# Altium PCB ArduinoUnoShield.PcbDoc
Units mil, origin at the board's own origin, x right, y up, seen from the top; angles counter-clockwise.
Board outline 2700 x 2100 mil, 2 copper layers (Top Layer, Bottom Layer); 16 components, 35 nets, 80 pads, 0 vias.
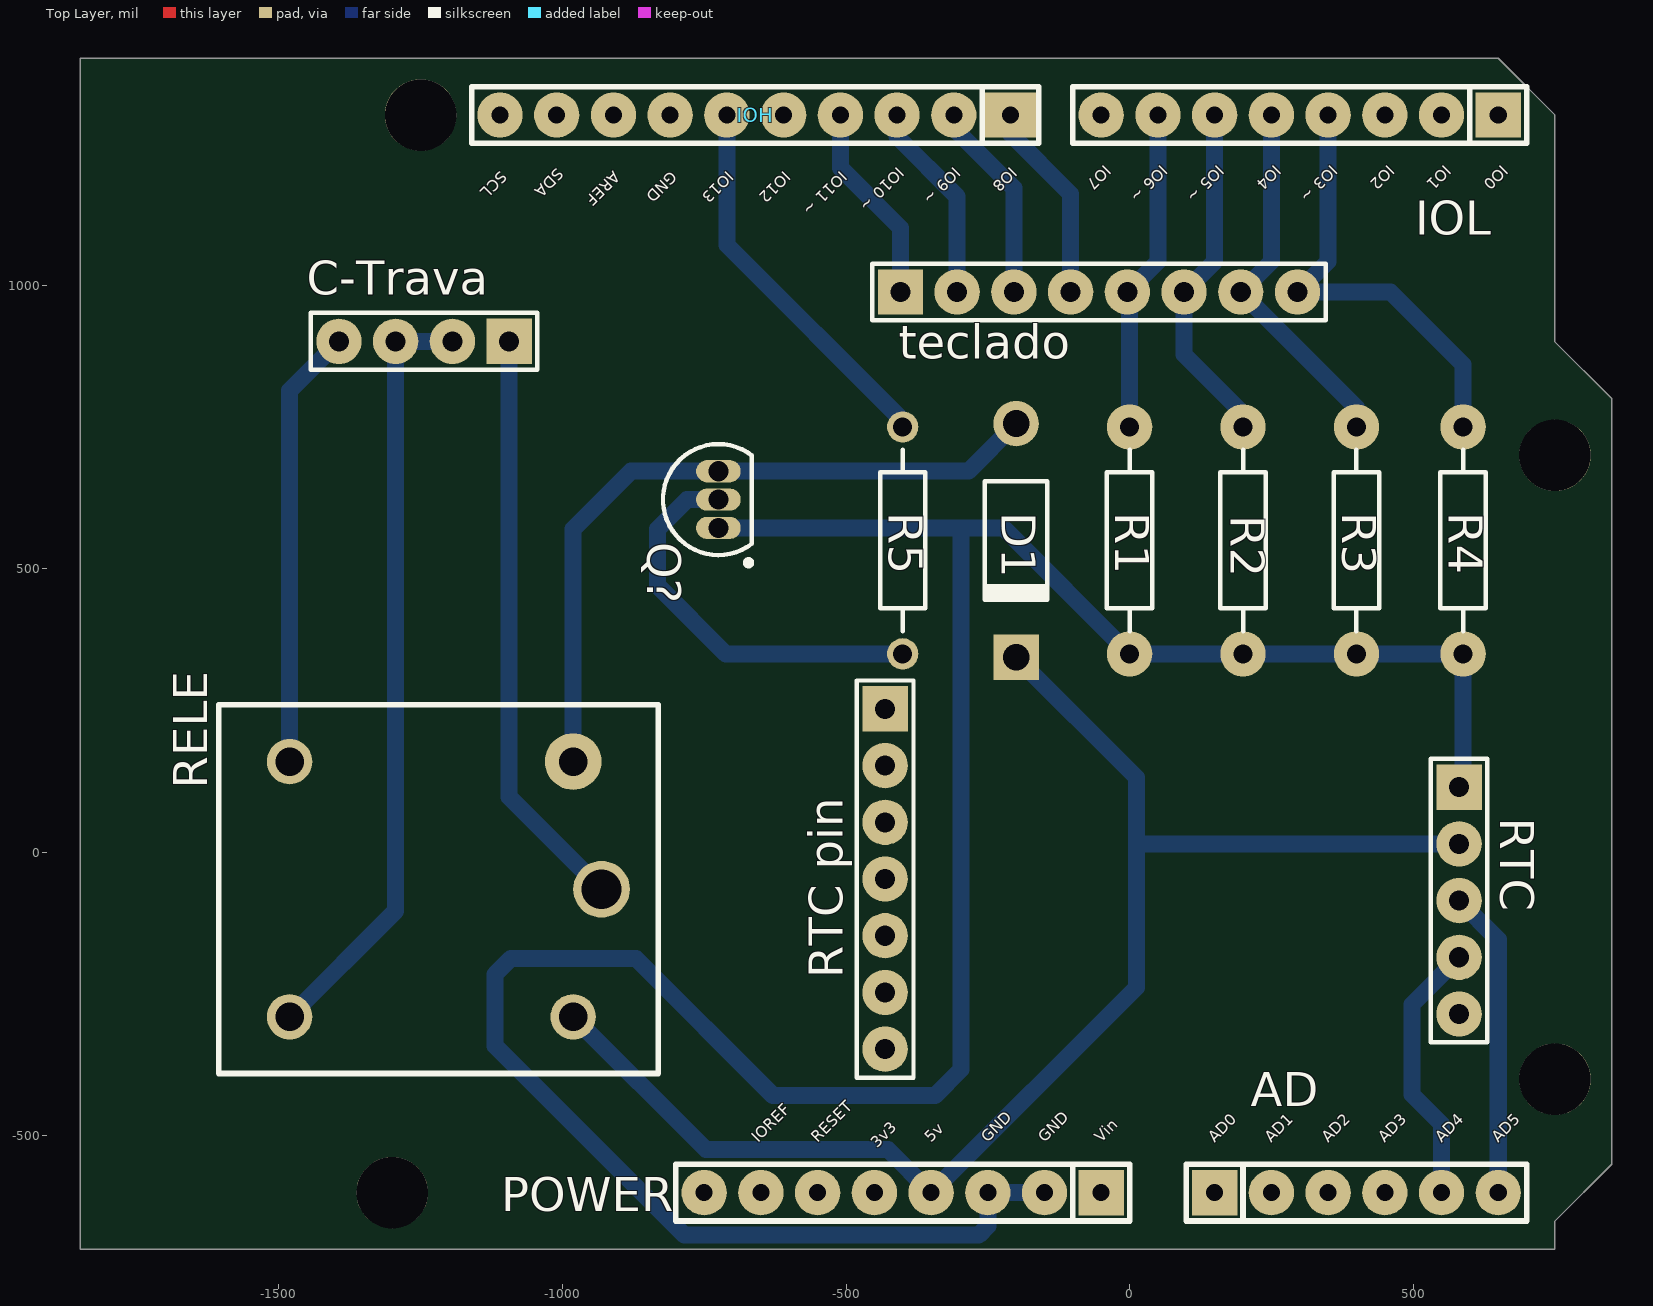
[diagram p0: Top Layer view]
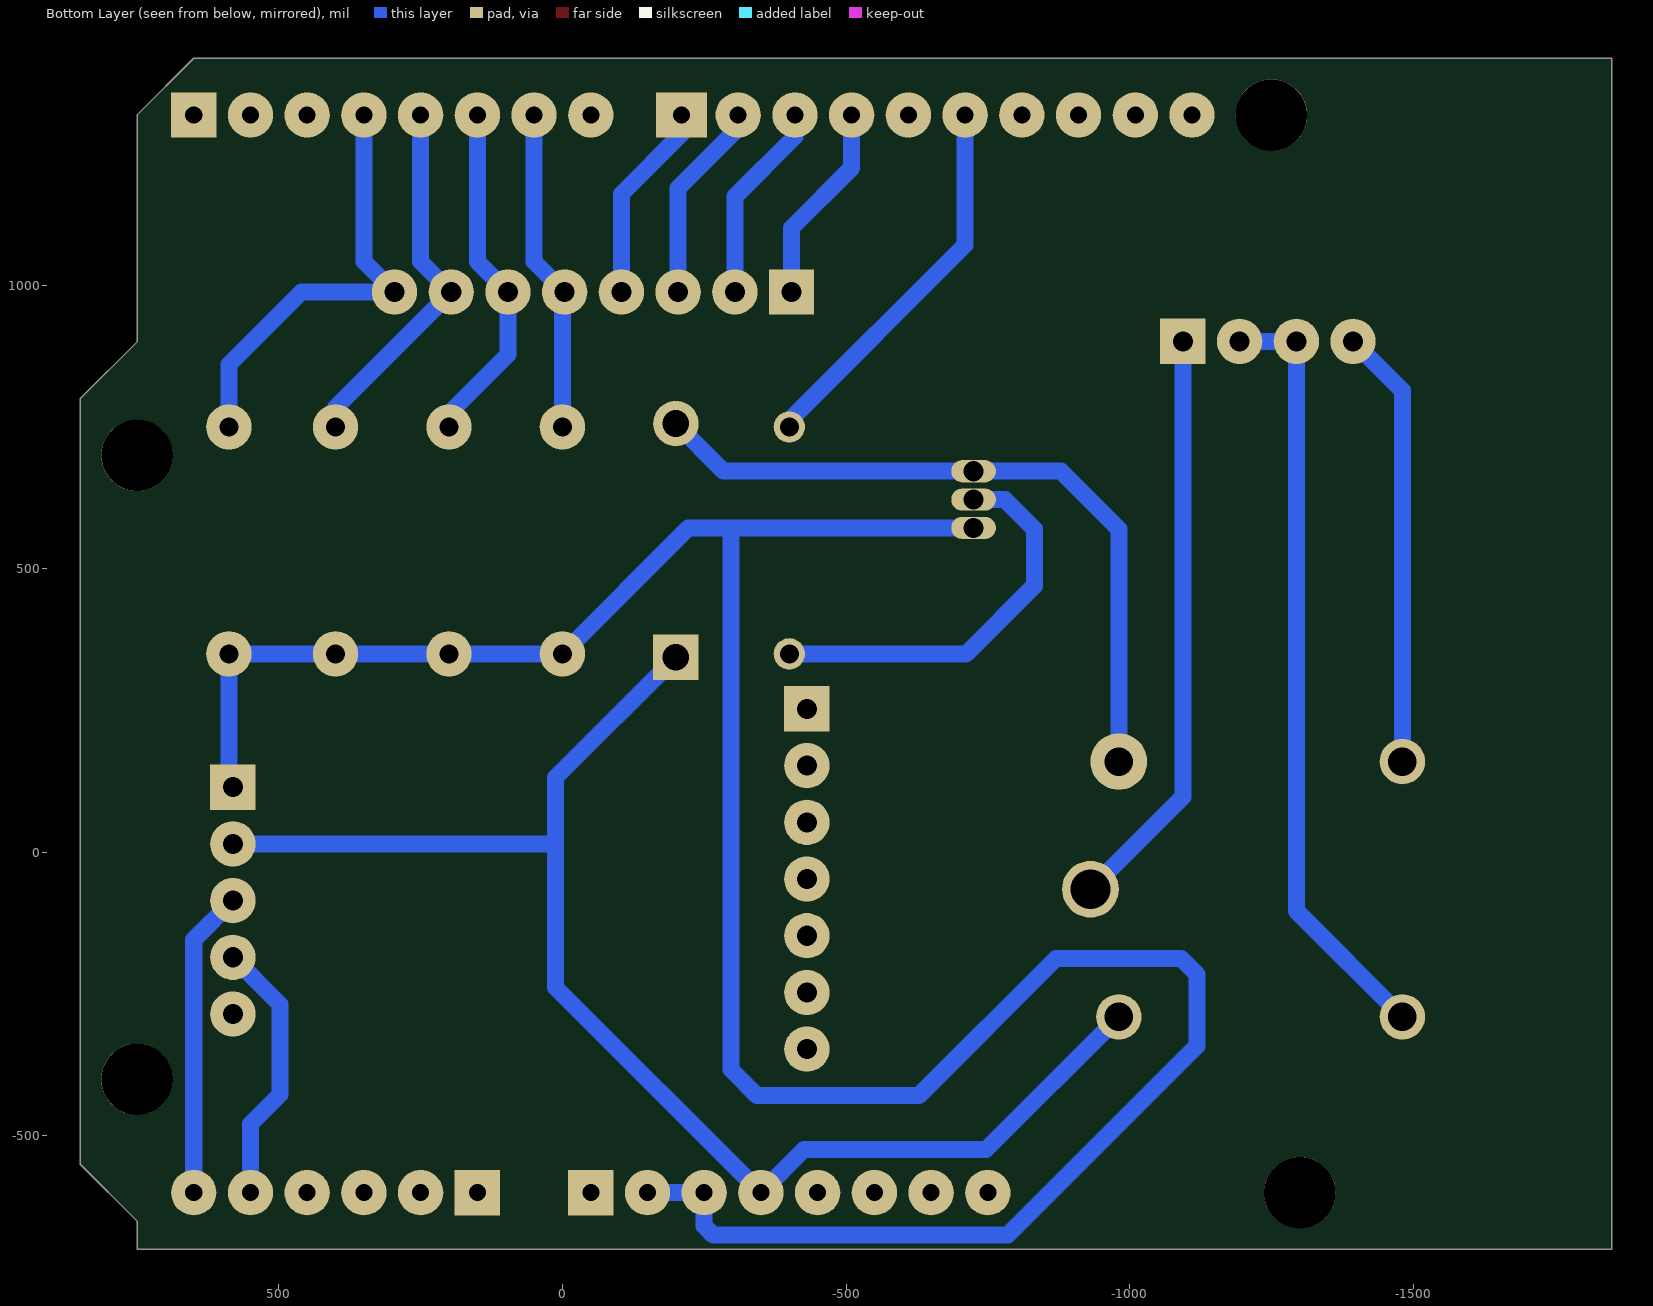
[diagram p1: Bottom Layer view, seen from below]

## Layer stack, top to bottom
Top Solder: solder mask 0.4, Solder Resist, Dk 3.5
Top Layer: signal copper 1.4
Dielectric1: dielectric 12.6, FR-4, Dk 4.8
Bottom Layer: signal copper 2.4
Bottom Solder: solder mask 0.4, Solder Resist, Dk 3.5

## Board outline
-1850,-700 -1850,1400 650,1400 750,1300 750,900 850,800 850,-550 750,-650 750,-700

## Design rules (kind name [scope] priority, off if disabled: settings)
Clearance [All] p1: gap=10
PolygonConnect [All] p1: connectstyle=Relief reliefconductorwidth=10 reliefentries=4 polygonreliefangle="90 Angle" airgapwidth=10
RoutingLayers [All] p1: top layer_v5=FALSE bottom layer_v5=TRUE
RoutingVias [All] p1: holewidth=28 width=50 viastyle="Through Hole" minholewidth=28 minwidth=50 maxholewidth=28 maxwidth=50
SilkToSolderMaskClearance SilkscreenOverComponentPads [IsPad] p1: minsilkscreentomaskgap=10 clearancetoexposedcopper=TRUE
SolderMaskExpansion [All] p1: expansion=4
UnpouredPolygon [All] p1: allowunpoured=FALSE
Width [All] p1: maxlimit=30 minlimit=30 preferedwidth=30
27 further rules are at their usual default settings.

## Components (designator, comment, footprint, x,y, rotation, side; value= is the part's Value field where it differs from the comment)
AD "AD" "Header 6x1 8.5mm" 150,-600 r0 top locked
C-Trava "Header 4" HDR1X4 -1094,901 r180 top
D1 "Diode 1N4007" DO-41 -200,550 r270 top
IOH "IOH" "Header 10x1 8.5mm" -210,1300 r180 top locked
IOL "IOL" "Header 8x1 8.5mm" 650,1300 r180 top locked
POWER "POWER_UNO" "Header 8x1 8.5mm" -50,-600 r180 top locked
Q? "2N3904" TO-92A -725,622 r0 top
R1 "220" AXIAL-0.4#1 0,550 r270 top
R2 "" AXIAL-0.4#1 200,550 r270 top
R3 "" AXIAL-0.4#1 400,550 r270 top
R4 "" AXIAL-0.4#1 588,550 r270 top
R5 "Res2" AXIAL-0.4#2 -400,550 r270 top
RELE "RELE" RELE -981,-290 r90 top
RTC "RTC" HDR1X5 581,115 r270 top
"RTC pin" "Header 7" HDR1X7 -431,253 r270 top
teclado "Header 8" HDR1X8 -404,988 r0 top

## Footprints (in the part's own frame and the unit in brackets; to place one, negate y for a bottom-side part, rotate by r counter-clockwise, add the part's x,y. Pads: shape width x height; smd on the part's side, far side on the other; paste and mask are expansions set on the pad)
AXIAL-0.4#1 [mil] "Axial Device, Thru-Hole; 2 Leads; 0.4 in Pin Spacing"
  round 80 hole 33.46: 1(-200,0) 2(200,0)
  silkscreen extent -160,-40 160,40
AXIAL-0.4#2 [mil] "Axial Device, Thru-Hole; 2 Leads; 0.4 in Pin Spacing"
  round 55.12 hole 33.46: 1(-200,0) 2(200,0)
  silkscreen extent -160,-40 160,40
DO-41 [mil] "Diode, Axial; Body 5.2 x 2.7 mm (LxDia. max), Lead Dia. 0.86 mm (max)"
  round 80 hole 47.24: 1(-205.91,0)
  rect 80x80 hole 47.24: 2(205.91,0)
  silkscreen extent -104,-55 108,55
HDR1X4 [mil] "Connector; Header; 4 Position"
  rect 80x80 hole 35.43: 1(0,0)
  round 80 hole 35.43: 2(100,0) 3(200,0) 4(300,0)
  silkscreen extent -50,-50 350,50
HDR1X5 [mil] "Connector; Header; 5 Position"
  rect 80x80 hole 35.43: 1(0,0)
  round 80 hole 35.43: 2(100,0) 3(200,0) 4(300,0) 5(400,0)
  silkscreen extent -50,-50 450,50
HDR1X7 [mil] "Connector; Header; 7 Position"
  rect 80x80 hole 35.43: 1(0,0)
  round 80 hole 35.43: 2(100,0) 3(200,0) 4(300,0) 5(400,0) 6(500,0) 7(600,0)
  silkscreen extent -50,-50 650,50
HDR1X8 [mil] "Connector; Header; 8 Position"
  rect 80x80 hole 35.43: 1(0,0)
  round 80 hole 35.43: 2(100,0) 3(200,0) 4(300,0) 5(400,0) 6(500,0) 7(600,0) 8(700,0)
  silkscreen extent -50,-50 750,50
"Header 6x1 8.5mm" [mil] "Stackable 6 pin header"
  rect 80x80 hole 30: 1(0,0)
  round 80 hole 30: 2(100,0) 3(200,0) 4(300,0) 5(400,0) 6(500,0)
  silkscreen extent -50,-50 550,50, body extent -50,-50 550,50, height 335
"Header 8x1 8.5mm" [mil] "Stackable 8 pin header"
  rect 80x80 hole 30: 1(0,0)
  round 80 hole 30: 2(100,0) 3(200,0) 4(300,0) 5(400,0) 6(500,0) 7(600,0) 8(700,0)
  silkscreen extent -50,-50 750,50, body extent -50,-50 750,50, height 335
"Header 10x1 8.5mm" [mil] "Stackable 10 pin header"
  rect 90x80 hole 30: 1(0,0)
  round 80 hole 30: 2(100,0) 3(200,0) 4(300,0) 5(400,0) 6(500,0) 7(600,0) 8(700,0) 9(800,0) 10(900,0)
  silkscreen extent -50,-50 950,50, body extent -50,-50 950,50, height 335
RELE [mil]
  round 80 hole 50: 1(0,0) 3(0,500) 5(450,500)
  round 100 hole 50: 2(450,0)
  round 100 hole 70: 4(225,-50)
  silkscreen extent -100,-150 550,625
TO-92A [mm] "TO, Flat Index; 3 In-Line, Axial Leads; Body Dia. 4.5mm; Leads 0.51 x 0.48 mm (max)"
  oval 2x1 hole 0.9: 1(0,-1.27) 2(0,0) 3(0,1.27)
  silkscreen extent -2.48,-2.95 1.5,2.48, body extent -2.5,-2.5 1.5,2.5, height 6.86

## Part data
C-Trava: "Header, 4-Pin"
D1: "1 Amp General Purpose Rectifier"
Q?: "NPN General Purpose Amplifier"
R1 R2 R3 R4: library part Res2, "Resistor"
R5: "Resistor"
RTC: library part "Header 5", "Header, 5-Pin"
"RTC pin": "Header, 7-Pin"
teclado: "Header, 8-Pin"

## Free pads (board coordinates)
  round 125.98 hole 125.98: 0(-1300,-600) 0(-1250,1300) 0(750,-400) 0(750,700)

## Nets (pads, with @x,y where several pads share a name; then routed paths per layer and width w, separated by ;. In a path a pad name is that pad's centre, name@x,y a point inside that pad or via, vN(x,y) a via of type N, cw(c..) or ccw(c..) an arc to the next point about the centre after c; other vN are vias at no path point)
3V3: POWER.5
5V: D1.2 POWER.4 RELE.1 RTC.2 | length 2510.3
  Bottom Layer w30: RELE.1 -747,-524 -426,-524 POWER.4 12,-238 12,15 ; D1.2 12,132.09 12,15 ; RTC.2 12,15
AD0: AD.1
AD1: AD.2
AD2: AD.3
AD3: AD.4
AD4: AD.5 RTC.4 | length 470.9
  Bottom Layer w30: AD.5 550,-479 498,-427 498,-268 RTC.4
AD5: AD.6 RTC.3 | length 543.6
  Bottom Layer w30: RTC.3 650,-154 AD.6
AREF: IOH.8
GND: IOH.7
IO0: IOL.1
IO1: IOL.2
IO2: IOL.3
IO3: IOL.4 R4.1 teclado.8 | length 789.4
  Bottom Layer w30: IOL.4 350,1042 teclado.8 460,988 588,860 R4.1
IO4: IOL.5 R3.1 teclado.7 | length 656.9
  Bottom Layer w30: IOL.5 250,1042 teclado.7 400,784 R3.1
IO5: IOL.6 R2.1 teclado.6 | length 615.4
  Bottom Layer w30: IOL.6 150,1042 teclado.6 96,878 200,774 R2.1
IO6: IOL.7 R1.1 teclado.5 | length 574
  Bottom Layer w30: R1.1 0,984 teclado.5 50,1042 IOL.7
IO7: IOL.8
IO8: IOH.1 teclado.4 | length 355.9
  Bottom Layer w30: IOH.1 -210,1267 -104,1161 teclado.4
IO9: IOH.2 teclado.3 | length 355.9
  Bottom Layer w30: IOH.2 -310,1277 -204,1171 teclado.3
IO10: IOH.3 teclado.2 | length 355.9
  Bottom Layer w30: IOH.3 -410,1262 -304,1156 teclado.2
IO11: IOH.4 teclado.1 | length 355.9
  Bottom Layer w30: IOH.4 -510,1207 -404,1101 teclado.1
IO12: IOH.5
IO13: IOH.6 R5.1 | length 678.4
  Bottom Layer w30: IOH.6 -710,1071 -400,761 R5.1
IOREF: POWER.7
NetC-trava_1: C-Trava.1 RELE.4 | length 1033.5
  Bottom Layer w30: C-Trava.1 -1094,98 RELE.4
NetC-trava_2: C-Trava.2 C-Trava.3 RELE.3 | length 1368.5
  Bottom Layer w30: RELE.3 -1294,-103 C-Trava.3 C-Trava.2
NetC-trava_4: C-Trava.4 RELE.5 | length 777
  Bottom Layer w30: RELE.5 -1481,814 C-Trava.4
NetD1_1: D1.1 Q?.3 RELE.2 | length 1268
  Bottom Layer w30: RELE.2 -981,570 -879,672 Q?.3 -283.91,672 D1.1
NetPOWER_2: POWER.2 POWER.3 Q?.1 R1.2 R2.2 R3.2 R4.2 RTC.1 | length 4839.8
  Bottom Layer w30: Q?.1 -222,572 R1.2 R2.2 R3.2 R4.2 RTC.1@588,122 ; -297,572 -297,-383 -343,-429 -628.42,-429 -870.42,-187 -1091,-187 -1119,-215 -1119,-341 -785,-675 -266,-675 -250,-659 POWER.3 POWER.2
NetQ?_2: Q?.2 R5.2 | length 710.2
  Bottom Layer w30: Q?.2 -780,622 -832,570 -832,470 -712,350 R5.2
RESET: POWER.6
SCL: IOH.10
SDA: IOH.9
VIN: POWER.1
pads on no net: "RTC pin.1" "RTC pin.2" "RTC pin.3" "RTC pin.4" "RTC pin.5" "RTC pin.6" "RTC pin.7" POWER.8 RTC.5

## Other copper
Multi-Layer:
  text "Guimbo" at -1840,258 h60 r270
  text "Board 0.2" at -1835,-130 h60 r270

## Silkscreen, mask and mechanical layers (free items; w line width, h text height)
Top Overlay:
  text "IO7" at -45,1212.93 h20 r225
  text "IO6 ~" at 55,1212.93 h20 r225
  text "IO5 ~" at 155,1212.93 h20 r225
  text "IO4" at 255,1212.93 h20 r225
  text "IO3 ~" at 355,1212.93 h20 r225
  text "IO2" at 455,1212.93 h20 r225
  text "IO1" at 555,1212.93 h20 r225
  text "IO0" at 655,1212.93 h20 r225
  text "IO10 ~" at -410,1210 h20 r225
  text "IO9 ~" at -310,1210 h20 r225
  text "IO8" at -210,1210 h20 r225
  text "SDA" at -1010,1207.93 h20 r225
  text "SCL" at -1110,1202.93 h20 r225
  text "AREF" at -910,1202.93 h20 r225
  text "GND" at -810,1202.93 h20 r225
  text "IO13" at -710,1202.93 h20 r225
  text "IO12" at -610,1202.93 h20 r225
  text "IO11 ~" at -510,1202.93 h20 r225
  text "IOREF" at -655,-512.93 h20 r45
  text "RESET" at -550,-512.93 h20 r45
  text "5v" at -350,-512.93 h20 r45
  text "GND" at -250,-512.93 h20 r45
  text "GND" at -150,-512.93 h20 r45
  text "Vin" at -50,-512.93 h20 r45
  text "AD0" at 150,-512.93 h20 r45
  text "AD1" at 250,-512.93 h20 r45
  text "AD2" at 350,-512.93 h20 r45
  text "AD3" at 450,-512.93 h20 r45
  text "AD4" at 550,-512.93 h20 r45
  text "AD5" at 650,-512.93 h20 r45
  text "3v3" at -445,-523 h20 r45
  text "RESET" at -555,-3215 h20 r45
  text "3v3" at -455,-3215 h20 r45
  text "5v" at -355,-3215 h20 r45
  text "GND" at -255,-3215 h20 r45
  text "GND" at -155,-3215 h20 r45
  text "Vin" at -55,-3215 h20 r45
Mechanical 1:
  circle w5: c-1250,1300 r62.99
  circle w5: c750,-400 r62.99
  circle w5: c-1300,-600 r62.99
  circle w5: c750,700 r62.99
  lines w5: -1850,-700 -1850,1400 650,1400 750,1300 750,900 850,800 850,-550 750,-650 750,-700 -1850,-700